# Altium PCB ProPrj_HTXStudio_OneHanded_Keyboard.PcbDoc (part 11 of 11)
Units mm, origin at the board's own origin, x right, y up, seen from the top; angles counter-clockwise.
Board outline 152.4 x 101.6 mm, 20 copper layers (F.Cu, F.Mask, B.Cu, B.Mask, In1.Cu, F.SilkS, In2.Cu, B.SilkS, F.Adhes, B.Adhes, F.Paste, B.Paste, Dwgs.User, Cmts.User, Eco1.User, Eco2.User, Edge.Cuts, Margin, B.CrtYd, F.CrtYd); 269 components, 0 nets, 747 pads, 1168 vias.
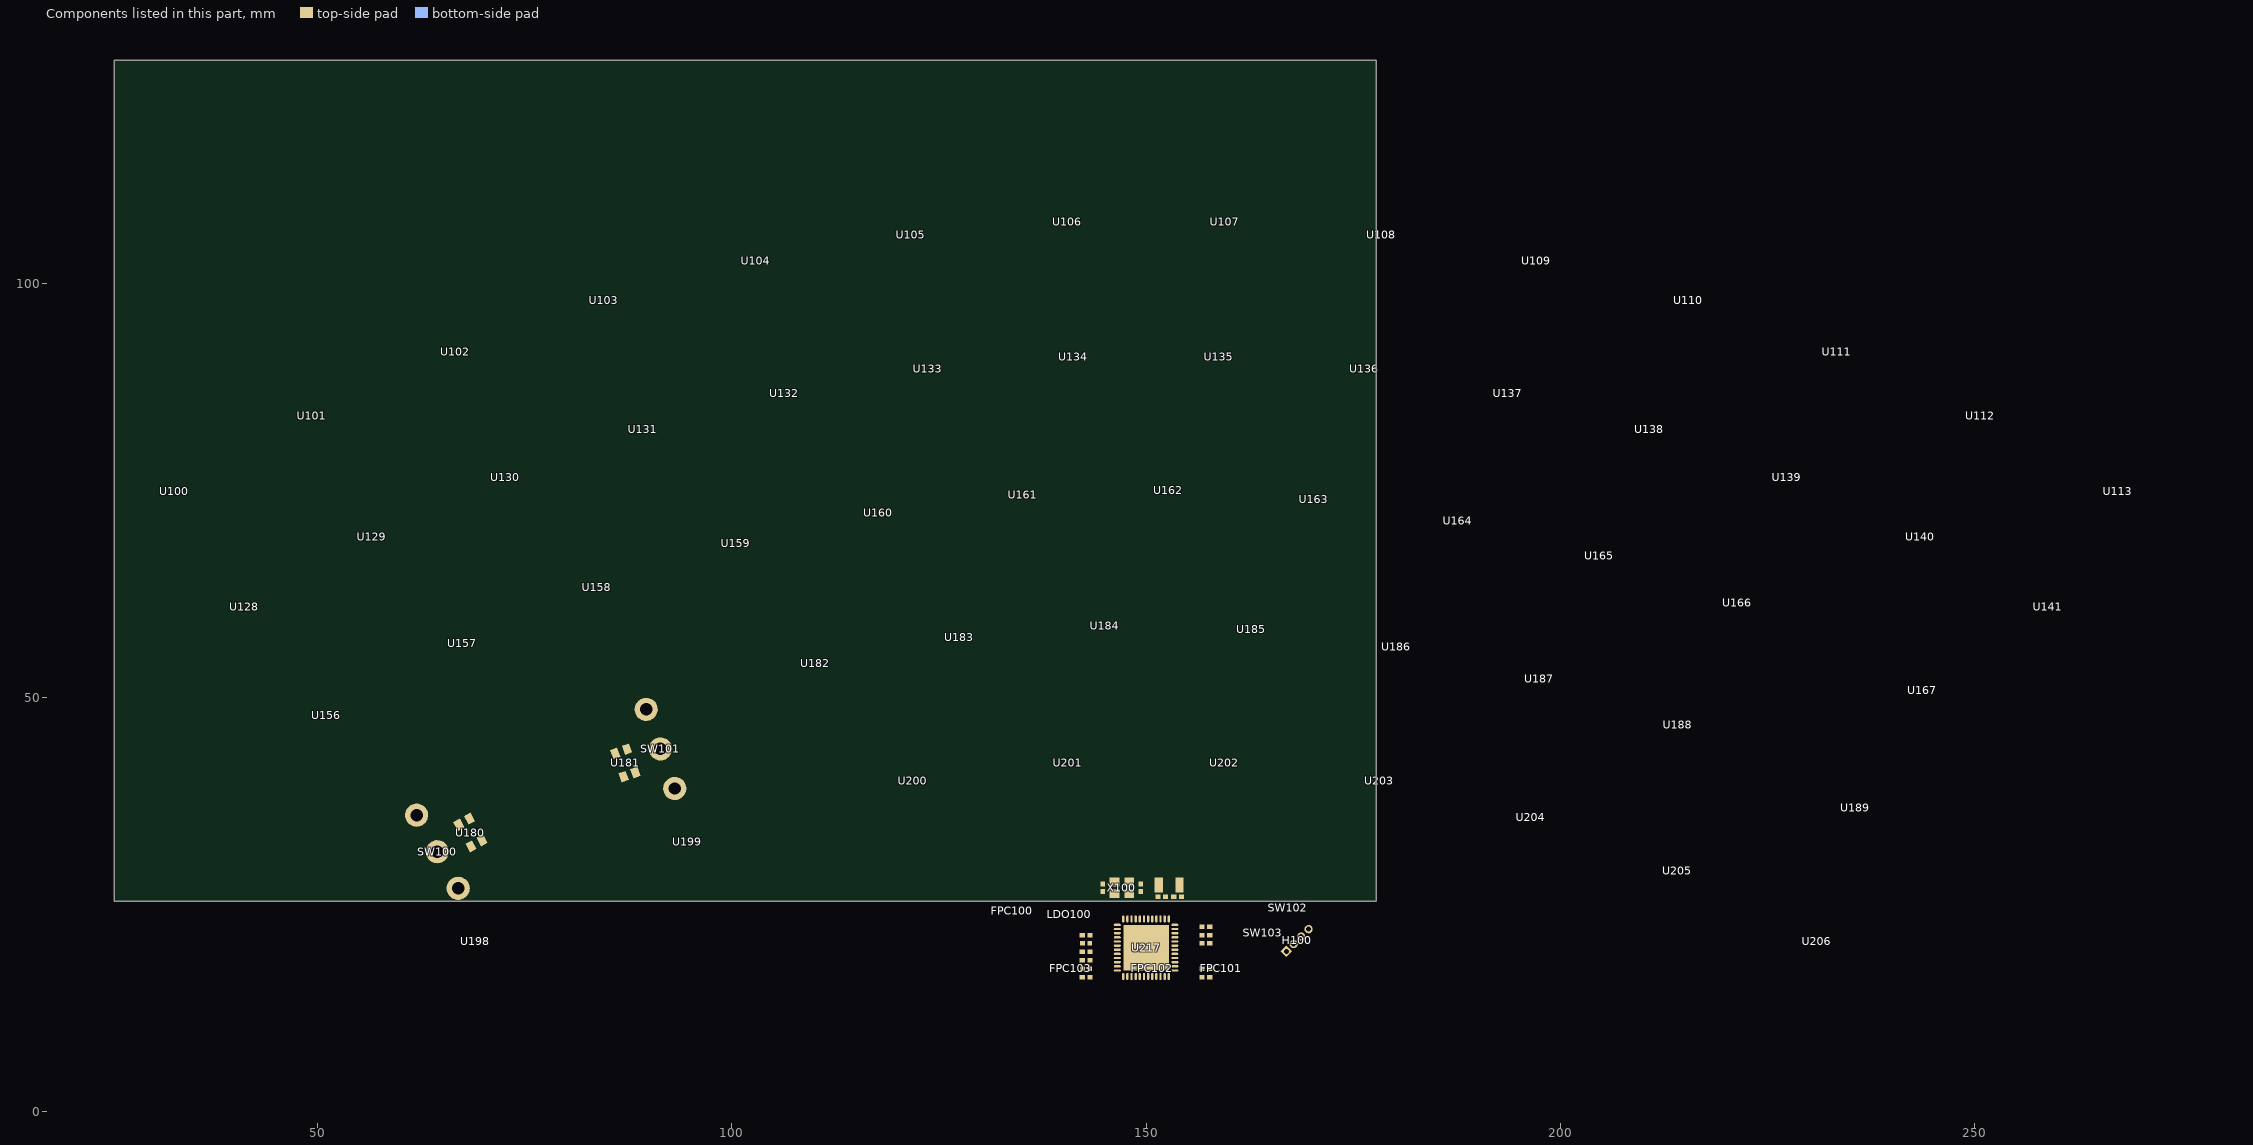
[diagram p23: the components of this part, seen from the top]

## Polygon pours and split planes (outlines as drawn) (continued)
no net on B.Cu "B.Cu--100" (solid, remove dead copper, pour order 762): 139.816,20.08 139.672,19.937 139.633,19.965 139.587,19.984 139.538,19.995 139.488,20 139.753,20.265 139.758,20.215 139.769,20.166 139.787,20.12
no net on B.Cu "B.Cu--94" (solid, remove dead copper, pour order 761): 147.512,94.063 147.275,93.87 147.237,93.93 147.199,93.984 147.179,94.005 147.155,94.023 147.126,94.036 147.092,94.043 147.37,94.295 147.374,94.254 147.383,94.221 147.397,94.194 147.415,94.171 147.46,94.124 147.485,94.097
no net on B.Cu "B.Cu--93" (solid, remove dead copper, pour order 760): 220.731,81.261 221.035,81.245 221.032,81.197 221.032,81.152 221.039,81.109 221.048,81.089 221.062,81.069 220.687,81.088 220.702,81.106 220.714,81.126 220.725,81.167 220.729,81.212
no net on B.Cu "B.Cu--86" (solid, remove dead copper, pour order 759): 159.849,20.406 159.706,20.55 159.734,20.589 159.753,20.635 159.764,20.685 159.769,20.735 160.034,20.469 159.985,20.464 159.935,20.453 159.888,20.435
no net on B.Cu "B.Cu--85" (solid, remove dead copper, pour order 758): 95.26,55.861 94.97,55.767 94.955,55.813 94.94,55.855 94.917,55.892 94.902,55.908 94.883,55.922 95.238,56.039 95.231,56.016 95.228,55.994 95.232,55.951 95.244,55.907
no net on B.Cu "B.Cu--84" (solid, remove dead copper, pour order 757): 150.142,80.483 149.836,80.492 149.839,80.542 149.839,80.586 149.831,80.629 149.821,80.649 149.807,80.669 150.182,80.656 150.167,80.637 150.156,80.618 150.145,80.576 150.142,80.532
no net on B.Cu "B.Cu--81" (solid, remove dead copper, pour order 756): 48.442,67.596 48.672,67.797 48.703,67.76 48.734,67.727 48.77,67.702 48.79,67.693 48.813,67.688 48.531,67.442 48.529,67.466 48.523,67.487 48.503,67.525 48.475,67.56
no net on B.Cu "B.Cu--77" (solid, remove dead copper, pour order 755): 193.532,58.925 193.23,58.965 193.237,59.014 193.242,59.059 193.238,59.101 193.23,59.123 193.219,59.144 193.59,59.093 193.573,59.076 193.561,59.058 193.546,59.017 193.538,58.973
no net on B.Cu "B.Cu--75" (solid, remove dead copper, pour order 754): 68.993,63.376 68.712,63.257 68.693,63.303 68.675,63.344 68.649,63.378 68.632,63.393 68.612,63.405 68.957,63.551 68.952,63.527 68.95,63.505 68.957,63.463 68.973,63.421
no net on B.Cu "B.Cu--72" (solid, remove dead copper, pour order 753): 156.211,22.016 156.211,21.66 156.157,21.666 156.115,21.676 156.096,21.677 156.077,21.675 156.057,21.666 156.035,21.65 156.035,22.025 156.057,22.009 156.077,22.001 156.096,21.998 156.115,22 156.157,22.01
no net on B.Cu "B.Cu--69" (solid, remove dead copper, pour order 752): 166.766,79.789 166.462,79.813 166.467,79.862 166.469,79.907 166.462,79.95 166.454,79.97 166.442,79.991 166.815,79.96 166.799,79.942 166.787,79.923 166.775,79.882 166.769,79.837
no net on B.Cu "B.Cu--68" (solid, remove dead copper, pour order 751): 222.817,30.992 222.526,31.081 222.541,31.128 222.552,31.171 222.556,31.214 222.552,31.236 222.543,31.259 222.902,31.15 222.883,31.135 222.867,31.119 222.846,31.082 222.831,31.039
no net on B.Cu "B.Cu--64" (solid, remove dead copper, pour order 750): 154.767,20.755 154.638,20.914 154.667,20.953 154.686,20.997 154.698,21.046 154.705,21.095 154.955,20.815 154.904,20.812 154.854,20.802 154.806,20.784 154.785,20.771
no net on B.Cu "B.Cu--62" (solid, remove dead copper, pour order 749): 144.214,63.814 143.91,63.785 143.907,63.834 143.902,63.879 143.887,63.919 143.876,63.938 143.859,63.956 144.233,63.991 144.22,63.97 144.213,63.95 144.207,63.907 144.209,63.862
no net on B.Cu "B.Cu--58" (solid, remove dead copper, pour order 748): 202.835,39.762 202.556,39.884 202.577,39.929 202.593,39.971 202.6,40.013 202.6,40.035 202.594,40.059 202.938,39.909 202.917,39.897 202.9,39.882 202.874,39.848 202.854,39.807
no net on B.Cu "B.Cu--55" (solid, remove dead copper, pour order 747): 150.694,93.412 150.996,93.451 151.001,93.403 151.009,93.359 151.025,93.319 151.037,93.3 151.054,93.282 150.681,93.234 150.694,93.255 150.701,93.276 150.705,93.319 150.701,93.364
no net on B.Cu "B.Cu--54" (solid, remove dead copper, pour order 746): 100.341,74.404 100.051,74.309 100.037,74.355 100.021,74.397 99.998,74.434 99.983,74.45 99.963,74.463 100.319,74.581 100.312,74.558 100.308,74.536 100.312,74.493 100.325,74.45
no net on B.Cu "B.Cu--53" (solid, remove dead copper, pour order 745): 82.8,47.329 82.739,47.03 82.692,47.04 82.647,47.048 82.604,47.046 82.582,47.041 82.561,47.03 82.635,47.398 82.652,47.38 82.669,47.366 82.708,47.348 82.752,47.337
no net on B.Cu "B.Cu--52" (solid, remove dead copper, pour order 744): 155.363,21.66 155.57,21.982 155.597,21.968 155.618,21.953 155.636,21.946 155.644,21.95 155.652,21.96 155.756,21.615 155.705,21.638 155.657,21.652 155.611,21.66 155.567,21.664 155.472,21.662
no net on B.Cu "B.Cu--50" (solid, remove dead copper, pour order 743): 150.327,31.185 150.025,31.14 150.019,31.189 150.011,31.233 149.995,31.273 149.982,31.291 149.965,31.308 150.336,31.363 150.325,31.342 150.318,31.32 150.314,31.278 150.32,31.233
no net on B.Cu "B.Cu--47" (solid, remove dead copper, pour order 742): 156.014,21.537 155.692,21.331 155.694,21.44 155.696,21.534 155.693,21.58 155.684,21.625 155.67,21.673 155.647,21.724 155.992,21.62 155.982,21.612 155.978,21.604 155.985,21.586 156.001,21.564
no net on B.Cu "B.Cu--39" (solid, remove dead copper, pour order 741): 133.001,92.749 133.296,92.827 133.308,92.78 133.322,92.737 133.342,92.699 133.356,92.682 133.375,92.667 133.013,92.571 133.021,92.594 133.026,92.615 133.025,92.659 133.015,92.703
no net on B.Cu "B.Cu--37" (solid, remove dead copper, pour order 601): 139.191,23.129 139.191,21.165 139.758,20.599 141.7,20.599 141.7,21.387 140.639,22.448 140.639,22.736 140.246,23.129
no net on B.Cu "B.Cu--36" (solid, remove dead copper, pour order 740): 116.889,77.744 116.587,77.703 116.581,77.751 116.574,77.795 116.558,77.836 116.545,77.855 116.528,77.871 116.9,77.922 116.888,77.901 116.881,77.88 116.877,77.837 116.882,77.792
no net on B.Cu "B.Cu--32" (solid, remove dead copper, pour order 739): 21 vertices, not listed, extent 155.754,21.453 156.328,22.014
no net on B.Cu "B.Cu--31" (solid, remove dead copper, pour order 738): 201.033,36.894 200.729,36.849 200.721,36.893 200.717,36.931 200.714,36.995 200.709,37.024 200.699,37.052 200.682,37.082 200.653,37.114 201.027,37.142 201.009,37.113 200.999,37.084 200.996,37.054 200.998,37.024 201.013,36.962
no net on B.Cu "B.Cu--29" (solid, remove dead copper, pour order 737): 199.407,74.291 199.103,74.319 199.108,74.367 199.111,74.412 199.104,74.454 199.096,74.476 199.084,74.496 199.457,74.463 199.441,74.445 199.429,74.426 199.416,74.385 199.411,74.34
no net on B.Cu "B.Cu--23" (solid, remove dead copper, pour order 736): 183.049,77.687 182.744,77.684 182.744,77.733 182.742,77.778 182.732,77.82 182.721,77.84 182.707,77.859 183.082,77.862 183.068,77.843 183.058,77.823 183.049,77.781 183.048,77.736
no net on B.Cu "B.Cu--19" (solid, remove dead copper, pour order 735): 186.333,43.789 186.029,43.819 186.035,43.867 186.037,43.912 186.032,43.954 186.024,43.976 186.011,43.996 186.384,43.959 186.368,43.941 186.357,43.922 186.343,43.881 186.337,43.837
no net on B.Cu "B.Cu--17" (solid, remove dead copper, pour order 734): 50.148,31.457 50.453,31.461 50.453,31.412 50.455,31.367 50.465,31.325 50.475,31.305 50.491,31.286 50.116,31.281 50.13,31.301 50.139,31.321 50.149,31.363 50.15,31.408
no net on B.Cu "B.Cu--16" (solid, remove dead copper, pour order 733): 247.685,50.019 247.698,50.273 247.742,50.276 247.791,50.286 247.838,50.302 247.876,50.325 247.857,49.95 247.822,49.976 247.776,49.998 247.729,50.013
no net on B.Cu "B.Cu--13" (solid, remove dead copper, pour order 732): 111.364,59.904 111.067,59.835 111.056,59.883 111.044,59.926 111.026,59.965 111.011,59.982 110.993,59.998 111.358,60.083 111.348,60.061 111.344,60.039 111.343,59.996 111.352,59.952
no net on B.Cu "B.Cu--11" (solid, remove dead copper, pour order 731): 246.035,55.765 245.763,55.901 245.785,55.944 245.803,55.985 245.814,56.027 245.814,56.049 245.809,56.073 246.145,55.906 246.124,55.895 246.105,55.881 246.078,55.848 246.057,55.809
no net on B.Cu "B.Cu--9" (solid, remove dead copper, pour order 730): 215.57,69.229 215.28,69.324 215.297,69.37 215.31,69.413 215.313,69.456 215.31,69.478 215.302,69.501 215.658,69.383 215.638,69.37 215.623,69.354 215.601,69.317 215.584,69.275
no net on B.Cu "B.Cu--8" (solid, remove dead copper, pour order 729): 217.585,15.112 217.279,15.116 217.281,15.164 217.28,15.209 217.271,15.251 217.261,15.271 217.246,15.291 217.622,15.287 217.607,15.267 217.597,15.248 217.586,15.206 217.585,15.161
no net on B.Cu "B.Cu--6" (solid, remove dead copper, pour order 728): 253.403,66.462 253.707,66.447 253.704,66.398 253.703,66.353 253.711,66.311 253.72,66.29 253.734,66.27 253.359,66.289 253.374,66.308 253.385,66.327 253.397,66.368 253.401,66.413
no net on B.Cu "B.Cu--4" (solid, remove dead copper, pour order 727): 143.853,20.918 144.209,20.918 144.203,20.864 144.193,20.822 144.191,20.803 144.194,20.784 144.203,20.764 144.218,20.743 143.843,20.743 143.859,20.764 143.868,20.784 143.87,20.803 143.869,20.822 143.859,20.864
no net on B.Cu "B.Cu--3" (solid, remove dead copper, pour order 726): 48.357,51.454 48.175,51.63 48.224,51.683 48.266,51.736 48.284,51.764 48.298,51.794 48.308,51.826 48.312,51.86 48.58,51.597 48.546,51.592 48.515,51.582 48.485,51.567 48.458,51.549 48.406,51.504
no net on In2.Cu "In2.Cu--118" (solid, remove dead copper, pour order 725): 133.782,23.989 134.087,23.989 134.086,23.94 134.087,23.895 134.097,23.853 134.107,23.833 134.122,23.814 133.747,23.814 133.762,23.833 133.772,23.853 133.782,23.895 133.783,23.94
no net on In2.Cu "In2.Cu--117" (solid, remove dead copper, pour order 724): 186.855,89.452 186.551,89.452 186.551,89.501 186.55,89.546 186.54,89.588 186.53,89.608 186.515,89.627 186.89,89.627 186.876,89.608 186.866,89.588 186.856,89.546 186.855,89.501
no net on In2.Cu "In2.Cu--116" (solid, remove dead copper, pour order 723): 120.257,45.937 120.561,45.937 120.561,45.888 120.562,45.843 120.572,45.801 120.582,45.781 120.596,45.762 120.221,45.762 120.236,45.781 120.246,45.801 120.256,45.843 120.257,45.888
no net on In2.Cu "In2.Cu--115" (solid, remove dead copper, pour order 722): 67.255,7.05 67.503,7.227 67.532,7.187 67.559,7.151 67.591,7.123 67.611,7.112 67.634,7.105 67.328,6.887 67.329,6.912 67.325,6.933 67.309,6.973 67.285,7.011
no net on In2.Cu "In2.Cu--114" (solid, remove dead copper, pour order 721): 159.442,17.169 159.442,17.423 159.487,17.427 159.534,17.439 159.581,17.458 159.617,17.483 159.617,17.108 159.581,17.132 159.534,17.151 159.487,17.164
no net on In2.Cu "In2.Cu--113" (solid, remove dead copper, pour order 720): 81.892,81.616 81.593,81.554 81.585,81.602 81.574,81.646 81.556,81.685 81.542,81.702 81.524,81.718 81.891,81.794 81.881,81.772 81.875,81.751 81.874,81.708 81.881,81.663
no net on In2.Cu "In2.Cu--112" (solid, remove dead copper, pour order 719): 84.401,69.191 84.098,69.161 84.092,69.203 84.092,69.241 84.09,69.305 84.087,69.335 84.078,69.364 84.061,69.393 84.035,69.425 84.41,69.443 84.39,69.414 84.379,69.385 84.374,69.356 84.376,69.325 84.386,69.261
no net on In2.Cu "In2.Cu--111" (solid, remove dead copper, pour order 718): 41.477,44.51 41.224,44.34 41.198,44.381 41.172,44.417 41.14,44.446 41.12,44.457 41.098,44.465 41.409,44.675 41.408,44.651 41.41,44.629 41.426,44.588 41.45,44.55
no net on In2.Cu "In2.Cu--110" (solid, remove dead copper, pour order 717): 133.388,92.034 133.084,92.034 133.088,92.11 133.093,92.174 133.091,92.205 133.084,92.234 133.071,92.264 133.048,92.294 133.423,92.294 133.401,92.264 133.388,92.234 133.381,92.204 133.378,92.174 133.384,92.11
no net on In2.Cu "In2.Cu--109" (solid, remove dead copper, pour order 716): 253.691,65.774 253.386,65.774 253.386,65.823 253.384,65.868 253.374,65.91 253.364,65.93 253.35,65.949 253.725,65.949 253.711,65.93 253.701,65.91 253.691,65.868 253.69,65.823
no net on In2.Cu "In2.Cu--108" (solid, remove dead copper, pour order 715): 133.261,79.546 132.957,79.546 132.957,79.595 132.956,79.64 132.946,79.682 132.936,79.702 132.921,79.721 133.296,79.721 133.282,79.702 133.272,79.682 133.262,79.64 133.261,79.595
no net on In2.Cu "In2.Cu--107" (solid, remove dead copper, pour order 714): 215.684,69.259 215.38,69.259 215.38,69.308 215.379,69.353 215.369,69.395 215.359,69.415 215.344,69.434 215.719,69.434 215.705,69.415 215.695,69.395 215.685,69.353 215.684,69.308
no net on In2.Cu "In2.Cu--106" (solid, remove dead copper, pour order 713): 186.043,44.467 186.347,44.496 186.347,44.447 186.35,44.401 186.361,44.359 186.373,44.34 186.388,44.321 186.014,44.292 186.027,44.313 186.037,44.333 186.044,44.375
no net on In2.Cu "In2.Cu--105" (solid, remove dead copper, pour order 712): 222.923,31.022 222.619,31.022 222.619,31.071 222.618,31.116 222.608,31.158 222.598,31.178 222.583,31.197 222.958,31.197 222.944,31.178 222.934,31.158 222.924,31.116 222.923,31.071
no net on In2.Cu "In2.Cu--104" (solid, remove dead copper, pour order 711): 50.627,30.929 50.378,30.753 50.35,30.793 50.323,30.829 50.291,30.857 50.271,30.867 50.248,30.875 50.554,31.092 50.553,31.068 50.557,31.046 50.573,31.006 50.598,30.969
no net on In2.Cu "In2.Cu--103" (solid, remove dead copper, pour order 710): 245.71,55.985 245.71,56.29 245.759,56.289 245.804,56.29 245.847,56.3 245.866,56.31 245.886,56.325 245.886,55.95 245.866,55.964 245.847,55.974 245.804,55.984 245.759,55.986
no net on In2.Cu "In2.Cu--102" (solid, remove dead copper, pour order 709): 134.461,23.989 134.765,23.989 134.765,23.94 134.766,23.895 134.776,23.853 134.786,23.833 134.801,23.814 134.425,23.814 134.439,23.833 134.449,23.853 134.459,23.895 134.461,23.94
no net on In2.Cu "In2.Cu--101" (solid, remove dead copper, pour order 708): 202.984,39.795 202.68,39.795 202.68,39.844 202.679,39.889 202.669,39.931 202.659,39.951 202.644,39.97 203.019,39.97 203.005,39.951 202.995,39.931 202.985,39.889 202.984,39.844
no net on In2.Cu "In2.Cu--100" (solid, remove dead copper, pour order 707): 232.321,46.78 232.017,46.78 232.017,46.829 232.016,46.874 232.006,46.916 231.996,46.936 231.981,46.955 232.356,46.955 232.342,46.936 232.332,46.916 232.322,46.874 232.321,46.829
no net on In2.Cu "In2.Cu--99" (solid, remove dead copper, pour order 706): 160.683,63.677 160.378,63.677 160.379,63.725 160.377,63.77 160.367,63.812 160.357,63.832 160.343,63.852 160.718,63.852 160.703,63.832 160.693,63.812 160.683,63.77 160.682,63.725
no net on In2.Cu "In2.Cu--98" (solid, remove dead copper, pour order 705): 159.868,20.388 159.688,20.568 159.716,20.602 159.741,20.645 159.76,20.691 159.769,20.735 160.034,20.469 159.991,20.461 159.945,20.442 159.902,20.416
no net on In2.Cu "In2.Cu--97" (solid, remove dead copper, pour order 704): 140.748,20.717 141.053,20.717 141.052,20.668 141.055,20.623 141.065,20.581 141.075,20.561 141.089,20.542 140.714,20.542 140.728,20.561 140.738,20.581 140.748,20.623 140.75,20.668
no net on In2.Cu "In2.Cu--96" (solid, remove dead copper, pour order 703): 133.104,23.989 133.408,23.989 133.408,23.94 133.409,23.895 133.419,23.853 133.429,23.833 133.443,23.814 133.068,23.814 133.083,23.833 133.093,23.853 133.103,23.895 133.104,23.94
no net on In2.Cu "In2.Cu--95" (solid, remove dead copper, pour order 702): 56.715,53.39 56.775,53.692 56.84,53.668 56.901,53.65 56.93,53.646 56.959,53.648 56.988,53.657 57.017,53.673 56.98,53.3 56.947,53.331 56.918,53.351 56.89,53.361 56.861,53.367 56.798,53.372 56.76,53.378
no net on In2.Cu "In2.Cu--94" (solid, remove dead copper, pour order 701): 98.995,86.458 98.693,86.426 98.688,86.475 98.682,86.52 98.667,86.56 98.655,86.579 98.64,86.597 99.012,86.636 99,86.615 98.992,86.595 98.987,86.552 98.99,86.507
no net on In2.Cu "In2.Cu--93" (solid, remove dead copper, pour order 700): 201.283,22.12 201.263,22.425 201.34,22.427 201.405,22.426 201.435,22.43 201.464,22.438 201.494,22.454 201.524,22.479 201.539,22.104 201.509,22.124 201.48,22.136 201.45,22.142 201.42,22.142 201.356,22.132
no net on In2.Cu "In2.Cu--92" (solid, remove dead copper, pour order 699): 115.12,27.022 114.813,27.001 114.808,27.046 114.807,27.085 114.81,27.148 114.807,27.177 114.8,27.206 114.784,27.238 114.758,27.273 115.133,27.267 115.113,27.24 115.101,27.212 115.096,27.183 115.095,27.153 115.104,27.09
no net on In2.Cu "In2.Cu--91" (solid, remove dead copper, pour order 698): 246.391,56.29 246.391,55.985 246.342,55.986 246.298,55.984 246.255,55.974 246.235,55.964 246.216,55.95 246.216,56.325 246.235,56.31 246.255,56.3 246.298,56.29 246.342,56.289
no net on In2.Cu "In2.Cu--90" (solid, remove dead copper, pour order 697): 151.017,92.744 150.713,92.766 150.717,92.814 150.718,92.859 150.711,92.902 150.703,92.923 150.69,92.943 151.064,92.916 151.048,92.898 151.037,92.878 151.024,92.837 151.019,92.792
no net on In2.Cu "In2.Cu--89" (solid, remove dead copper, pour order 696): 177.33,62.02 177.026,62.02 177.026,62.069 177.025,62.114 177.015,62.156 177.005,62.176 176.99,62.195 177.365,62.195 177.351,62.176 177.341,62.156 177.331,62.114 177.33,62.069
no net on In2.Cu "In2.Cu--88" (solid, remove dead copper, pour order 695): 100.241,74.339 99.937,74.339 99.937,74.388 99.936,74.433 99.926,74.475 99.916,74.495 99.901,74.514 100.276,74.514 100.262,74.495 100.252,74.475 100.242,74.433 100.241,74.388
no net on In2.Cu "In2.Cu--87" (solid, remove dead copper, pour order 694): 116.845,77.72 116.54,77.72 116.541,77.769 116.538,77.814 116.529,77.856 116.519,77.876 116.504,77.895 116.879,77.895 116.865,77.876 116.855,77.856 116.845,77.814 116.844,77.769
no net on In2.Cu "In2.Cu--86" (solid, remove dead copper, pour order 693): 199.438,74.303 199.132,74.303 199.133,74.352 199.131,74.397 199.121,74.439 199.111,74.459 199.098,74.478 199.472,74.478 199.458,74.459 199.448,74.439 199.438,74.397 199.436,74.352
no net on In2.Cu "In2.Cu--85" (solid, remove dead copper, pour order 692): 158.544,26.252 158.849,26.252 158.848,26.203 158.849,26.158 158.859,26.116 158.869,26.096 158.884,26.077 158.509,26.077 158.524,26.096 158.534,26.116 158.543,26.158 158.545,26.203
no net on In2.Cu "In2.Cu--84" (solid, remove dead copper, pour order 691): 204.033,85.951 203.728,85.951 203.729,85.999 203.727,86.044 203.717,86.086 203.707,86.106 203.693,86.126 204.068,86.126 204.054,86.106 204.044,86.086 204.034,86.044 204.033,85.999
no net on In2.Cu "In2.Cu--83" (solid, remove dead copper, pour order 690): 162.003,26.342 162.311,26.328 162.296,26.261 162.288,26.199 162.289,26.169 162.295,26.141 162.308,26.114 162.328,26.088 161.954,26.065 161.969,26.09 161.979,26.122 161.99,26.198 161.997,26.277
no net on In2.Cu "In2.Cu--82" (solid, remove dead copper, pour order 689): 201.99,22.508 202.076,22.203 202.025,22.203 201.977,22.199 201.955,22.194 201.935,22.185 201.917,22.172 201.901,22.153 201.815,22.518 201.86,22.501 201.899,22.499 201.939,22.504
no net on In2.Cu "In2.Cu--81" (solid, remove dead copper, pour order 688): 161.284,26.348 161.589,26.322 161.573,26.253 161.563,26.19 161.563,26.16 161.568,26.131 161.58,26.102 161.599,26.074 161.225,26.079 161.251,26.113 161.267,26.143 161.275,26.172 161.278,26.202 161.277,26.266 161.278,26.304
no net on In2.Cu "In2.Cu--80" (solid, remove dead copper, pour order 687): 136.944,47.288 136.64,47.288 136.64,47.337 136.639,47.382 136.629,47.424 136.619,47.444 136.604,47.463 136.979,47.463 136.965,47.444 136.955,47.424 136.945,47.382 136.944,47.337
no net on In2.Cu "In2.Cu--79" (solid, remove dead copper, pour order 686): 110.986,60.542 111.29,60.542 111.29,60.493 111.291,60.448 111.301,60.406 111.311,60.386 111.325,60.367 110.95,60.367 110.965,60.386 110.975,60.406 110.985,60.448 110.986,60.493
no net on In2.Cu "In2.Cu--78" (solid, remove dead copper, pour order 685): 217.285,15.795 217.589,15.794 217.589,15.745 217.59,15.7 217.6,15.658 217.61,15.638 217.624,15.619 217.249,15.62 217.263,15.639 217.273,15.659 217.283,15.701 217.285,15.746
no net on In2.Cu "In2.Cu--77" (solid, remove dead copper, pour order 684): 215.38,69.94 215.684,69.94 215.684,69.891 215.685,69.846 215.695,69.804 215.705,69.784 215.719,69.765 215.344,69.765 215.359,69.784 215.369,69.804 215.379,69.846 215.38,69.891
no net on In2.Cu "In2.Cu--76" (solid, remove dead copper, pour order 683): 231.305,63.29 231.001,63.29 231.001,63.339 231,63.384 230.99,63.426 230.98,63.446 230.965,63.465 231.34,63.465 231.326,63.446 231.316,63.426 231.306,63.384 231.305,63.339
no net on In2.Cu "In2.Cu--75" (solid, remove dead copper, pour order 682): 116.516,78.389 116.82,78.411 116.822,78.362 116.828,78.317 116.841,78.276 116.852,78.257 116.868,78.239 116.494,78.212 116.506,78.232 116.515,78.253 116.522,78.296 116.52,78.341
no net on In2.Cu "In2.Cu--74" (solid, remove dead copper, pour order 681): 40.848,44.91 41.104,45.076 41.13,45.034 41.156,44.997 41.186,44.968 41.206,44.956 41.229,44.948 40.913,44.744 40.916,44.768 40.913,44.79 40.899,44.831 40.875,44.869
no net on In2.Cu "In2.Cu--73" (solid, remove dead copper, pour order 680): 221.018,80.573 220.714,80.573 220.714,80.621 220.713,80.667 220.703,80.709 220.693,80.728 220.678,80.748 221.053,80.748 221.039,80.728 221.029,80.709 221.019,80.667 221.018,80.621
no net on In2.Cu "In2.Cu--72" (solid, remove dead copper, pour order 679): 177.026,62.701 177.33,62.701 177.33,62.652 177.331,62.607 177.341,62.565 177.351,62.545 177.365,62.526 176.99,62.526 177.005,62.545 177.015,62.565 177.025,62.607 177.026,62.652
no net on In2.Cu "In2.Cu--71" (solid, remove dead copper, pour order 678): 66.647,40.161 66.647,39.856 66.599,39.857 66.553,39.855 66.512,39.845 66.492,39.835 66.473,39.821 66.473,40.196 66.492,40.181 66.512,40.171 66.553,40.161 66.599,40.16
no net on In2.Cu "In2.Cu--70" (solid, remove dead copper, pour order 677): 169.914,47.08 170.218,47.08 170.218,47.031 170.219,46.986 170.229,46.944 170.239,46.924 170.253,46.905 169.878,46.905 169.893,46.924 169.903,46.944 169.913,46.986 169.914,47.031
no net on In2.Cu "In2.Cu--69" (solid, remove dead copper, pour order 676): 141.447,20.59 141.753,20.59 141.751,20.541 141.753,20.496 141.763,20.454 141.773,20.434 141.787,20.415 141.413,20.415 141.427,20.434 141.437,20.454 141.447,20.496 141.449,20.541
no net on In2.Cu "In2.Cu--68" (solid, remove dead copper, pour order 675): 65.967,39.856 65.967,40.161 66.015,40.16 66.061,40.161 66.102,40.171 66.122,40.181 66.142,40.196 66.142,39.821 66.122,39.835 66.102,39.845 66.061,39.855 66.015,39.857
no net on In2.Cu "In2.Cu--67" (solid, remove dead copper, pour order 674): 68.568,63.971 68.872,63.971 68.872,63.922 68.873,63.877 68.883,63.835 68.893,63.815 68.907,63.796 68.532,63.796 68.547,63.815 68.557,63.835 68.567,63.877 68.568,63.922
no net on In2.Cu "In2.Cu--66" (solid, remove dead copper, pour order 673): 82.776,47.4 82.776,47.095 82.728,47.096 82.682,47.094 82.641,47.084 82.621,47.074 82.602,47.06 82.602,47.435 82.621,47.42 82.641,47.41 82.682,47.4 82.728,47.399
no net on In2.Cu "In2.Cu--65" (solid, remove dead copper, pour order 672): 83.996,69.902 84.294,69.963 84.303,69.915 84.314,69.872 84.333,69.833 84.346,69.815 84.364,69.799 83.997,69.723 84.007,69.745 84.013,69.767 84.014,69.81 84.006,69.854
no net on In2.Cu "In2.Cu--64" (solid, remove dead copper, pour order 671): 99.901,75.002 100.205,75.034 100.209,74.985 100.215,74.941 100.229,74.9 100.242,74.881 100.258,74.863 99.885,74.824 99.897,74.845 99.905,74.866 99.911,74.908 99.907,74.954
no net on In2.Cu "In2.Cu--63" (solid, remove dead copper, pour order 670): 134.74,23.308 134.486,23.308 134.481,23.352 134.469,23.4 134.449,23.446 134.425,23.483 134.801,23.483 134.776,23.446 134.757,23.4 134.745,23.352
no net on In2.Cu "In2.Cu--62" (solid, remove dead copper, pour order 669): 94.57,56.025 94.603,56.329 94.673,56.313 94.736,56.301 94.766,56.3 94.796,56.304 94.825,56.315 94.854,56.334 94.834,55.959 94.802,55.986 94.773,56.003 94.744,56.012 94.714,56.016 94.65,56.017 94.612,56.019
no net on In2.Cu "In2.Cu--61" (solid, remove dead copper, pour order 668): 193.579,58.942 193.274,58.942 193.275,58.991 193.273,59.036 193.263,59.078 193.253,59.098 193.239,59.117 193.614,59.117 193.6,59.098 193.59,59.078 193.58,59.036 193.578,58.991
no net on In2.Cu "In2.Cu--60" (solid, remove dead copper, pour order 667): 237.683,73.502 237.378,73.502 237.379,73.55 237.378,73.596 237.368,73.637 237.358,73.657 237.343,73.677 237.718,73.677 237.704,73.657 237.694,73.637 237.684,73.596 237.682,73.55
no net on In2.Cu "In2.Cu--59" (solid, remove dead copper, pour order 666): 232.017,47.461 232.321,47.461 232.321,47.412 232.322,47.367 232.332,47.325 232.342,47.305 232.356,47.286 231.981,47.286 231.996,47.305 232.006,47.325 232.016,47.367 232.017,47.412
no net on In2.Cu "In2.Cu--58" (solid, remove dead copper, pour order 665): 193.282,59.628 193.586,59.617 193.586,59.568 193.586,59.524 193.596,59.482 193.605,59.462 193.619,59.442 193.244,59.453 193.259,59.472 193.269,59.492 193.28,59.534 193.282,59.579
no net on In2.Cu "In2.Cu--57" (solid, remove dead copper, pour order 664): 67.995,6.694 67.794,6.464 67.737,6.517 67.692,6.564 67.669,6.583 67.642,6.598 67.609,6.608 67.57,6.611 67.826,6.886 67.833,6.85 67.845,6.821 67.863,6.797 67.883,6.775 67.936,6.737
no net on In2.Cu "In2.Cu--56" (solid, remove dead copper, pour order 663): 153.023,48.464 153.327,48.464 153.327,48.415 153.328,48.37 153.338,48.328 153.348,48.308 153.362,48.289 152.987,48.289 153.002,48.308 153.012,48.328 153.022,48.37 153.023,48.415
no net on In2.Cu "In2.Cu--55" (solid, remove dead copper, pour order 662): 184.633,27.046 184.51,27.326 184.581,27.351 184.642,27.372 184.669,27.386 184.693,27.404 184.714,27.429 184.733,27.461 184.887,27.119 184.85,27.127 184.817,27.128 184.787,27.122 184.759,27.111 184.702,27.081
no net on In2.Cu "In2.Cu--54" (solid, remove dead copper, pour order 661): 133.522,23.314 133.167,23.311 133.145,23.335 133.131,23.356 133.117,23.395 133.103,23.434 133.09,23.456 133.07,23.481 133.442,23.481 133.426,23.458 133.422,23.436 133.426,23.416 133.438,23.396 133.476,23.357
no net on In2.Cu "In2.Cu--53" (solid, remove dead copper, pour order 660): 144.183,63.798 143.879,63.798 143.879,63.847 143.878,63.892 143.868,63.934 143.858,63.954 143.843,63.973 144.218,63.973 144.204,63.954 144.194,63.934 144.184,63.892 144.183,63.847
no net on In2.Cu "In2.Cu--52" (solid, remove dead copper, pour order 659): 199.124,74.977 199.428,74.991 199.428,74.942 199.43,74.896 199.441,74.854 199.452,74.834 199.466,74.816 199.091,74.802 199.105,74.822 199.115,74.842 199.124,74.884 199.124,74.929
no net on In2.Cu "In2.Cu--51" (solid, remove dead copper, pour order 658): 111.29,59.861 110.986,59.861 110.986,59.91 110.985,59.955 110.975,59.997 110.965,60.017 110.95,60.036 111.325,60.036 111.311,60.017 111.301,59.997 111.291,59.955 111.29,59.91
no net on In2.Cu "In2.Cu--50" (solid, remove dead copper, pour order 657): 103.858,41.685 103.858,41.38 103.81,41.381 103.764,41.379 103.723,41.369 103.703,41.359 103.684,41.345 103.684,41.72 103.703,41.705 103.723,41.695 103.764,41.685 103.81,41.684
no net on In2.Cu "In2.Cu--49" (solid, remove dead copper, pour order 656): 133.084,30.697 133.388,30.697 133.388,30.648 133.389,30.603 133.399,30.561 133.409,30.541 133.423,30.522 133.048,30.522 133.063,30.541 133.073,30.561 133.083,30.603 133.084,30.648
no net on In2.Cu "In2.Cu--48" (solid, remove dead copper, pour order 655): 116.013,89.844 115.709,89.823 115.706,89.872 115.702,89.917 115.689,89.958 115.678,89.977 115.662,89.995 116.036,90.022 116.023,90.001 116.014,89.981 116.007,89.938 116.009,89.893
no net on In2.Cu "In2.Cu--47" (solid, remove dead copper, pour order 654): 166.301,79.988 166.301,80.293 166.35,80.292 166.395,80.293 166.437,80.303 166.457,80.313 166.476,80.328 166.476,79.953 166.457,79.967 166.437,79.977 166.395,79.987 166.35,79.989
no net on In2.Cu "In2.Cu--46" (solid, remove dead copper, pour order 653): 136.64,47.969 136.944,47.969 136.944,47.92 136.945,47.875 136.955,47.833 136.965,47.813 136.979,47.794 136.604,47.794 136.619,47.813 136.629,47.833 136.639,47.875 136.64,47.92
no net on In2.Cu "In2.Cu--45" (solid, remove dead copper, pour order 652): 149.975,31.84 150.279,31.84 150.279,31.791 150.28,31.746 150.29,31.704 150.3,31.684 150.314,31.665 149.939,31.665 149.954,31.684 149.964,31.704 149.974,31.746 149.975,31.791
no net on In2.Cu "In2.Cu--44" (solid, remove dead copper, pour order 651): 170.218,46.399 169.914,46.399 169.914,46.448 169.913,46.493 169.903,46.535 169.893,46.555 169.878,46.574 170.253,46.574 170.239,46.555 170.229,46.535 170.219,46.493 170.218,46.448
no net on In2.Cu "In2.Cu--43" (solid, remove dead copper, pour order 650): 32.584,58.221 32.328,58.055 32.303,58.096 32.276,58.133 32.246,58.163 32.226,58.174 32.203,58.183 32.518,58.386 32.517,58.362 32.519,58.34 32.534,58.3 32.557,58.261
no net on In2.Cu "In2.Cu--42" (solid, remove dead copper, pour order 649): 169.116,91.726 168.811,91.726 168.812,91.775 168.811,91.82 168.801,91.862 168.791,91.882 168.777,91.901 169.152,91.901 169.138,91.882 169.128,91.862 169.118,91.82 169.116,91.775
no net on In2.Cu "In2.Cu--41" (solid, remove dead copper, pour order 648): 159.286,26.252 159.591,26.252 159.59,26.203 159.591,26.158 159.601,26.116 159.611,26.096 159.626,26.077 159.251,26.077 159.265,26.096 159.275,26.116 159.285,26.158 159.286,26.203
no net on In2.Cu "In2.Cu--40" (solid, remove dead copper, pour order 647): 150.366,31.123 150.066,31.047 150.045,31.111 150.023,31.187 149.997,31.26 149.981,31.289 149.962,31.312 150.333,31.358 150.319,31.33 150.311,31.301 150.31,31.272 150.315,31.243 150.336,31.184
no net on In2.Cu "In2.Cu--39" (solid, remove dead copper, pour order 646): 82.096,47.095 82.096,47.4 82.144,47.399 82.19,47.4 82.231,47.41 82.251,47.42 82.271,47.435 82.271,47.06 82.251,47.074 82.231,47.084 82.19,47.094 82.144,47.096
no net on In2.Cu "In2.Cu--38" (solid, remove dead copper, pour order 645): 231.001,63.971 231.305,63.971 231.305,63.922 231.306,63.877 231.316,63.835 231.326,63.815 231.34,63.796 230.965,63.796 230.98,63.815 230.99,63.835 231,63.877 231.001,63.922
no net on In2.Cu "In2.Cu--37" (solid, remove dead copper, pour order 644): 186.367,43.802 186.062,43.802 186.063,43.85 186.061,43.895 186.051,43.937 186.041,43.957 186.027,43.977 186.402,43.977 186.388,43.957 186.378,43.937 186.367,43.895 186.366,43.85
no net on In2.Cu "In2.Cu--36" (solid, remove dead copper, pour order 643): 209.096,54.207 209.096,54.512 209.144,54.511 209.19,54.512 209.231,54.522 209.251,54.532 209.271,54.547 209.271,54.172 209.251,54.186 209.231,54.196 209.19,54.206 209.144,54.208
no net on In2.Cu "In2.Cu--35" (solid, remove dead copper, pour order 642): 185.348,27.581 185.409,27.279 185.364,27.267 185.325,27.261 185.262,27.255 185.235,27.25 185.207,27.239 185.177,27.219 185.144,27.188 185.106,27.561 185.135,27.545 185.164,27.536 185.193,27.535 185.222,27.538 185.284,27.556
no net on In2.Cu "In2.Cu--33" (solid, remove dead copper, pour order 641): 153.327,47.783 153.023,47.783 153.023,47.832 153.022,47.877 153.012,47.919 153.002,47.939 152.987,47.958 153.362,47.958 153.348,47.939 153.338,47.919 153.328,47.877 153.327,47.832
no net on In2.Cu "In2.Cu--32" (solid, remove dead copper, pour order 640): 202.68,40.476 202.984,40.476 202.984,40.427 202.985,40.382 202.995,40.34 203.005,40.32 203.019,40.301 202.644,40.301 202.659,40.32 202.669,40.34 202.679,40.382 202.68,40.427
no net on In2.Cu "In2.Cu--31" (solid, remove dead copper, pour order 639): 127.673,62.528 127.369,62.528 127.369,62.577 127.368,62.622 127.358,62.664 127.348,62.684 127.333,62.703 127.708,62.703 127.694,62.684 127.684,62.664 127.674,62.622 127.673,62.577
no net on In2.Cu "In2.Cu--30" (solid, remove dead copper, pour order 638): 217.362,15.006 217.097,15.16 217.141,15.216 217.177,15.269 217.19,15.296 217.198,15.325 217.2,15.356 217.195,15.391 217.53,15.222 217.492,15.204 217.465,15.183 217.445,15.16 217.429,15.135 217.402,15.077 217.385,15.043
no net on In2.Cu "In2.Cu--29" (solid, remove dead copper, pour order 637): 209.776,54.512 209.776,54.207 209.728,54.208 209.682,54.206 209.641,54.196 209.621,54.186 209.602,54.172 209.602,54.547 209.621,54.532 209.641,54.522 209.682,54.512 209.728,54.511
no net on In2.Cu "In2.Cu--28" (solid, remove dead copper, pour order 636): 167.755,30.646 168.059,30.627 168.059,30.534 168.067,30.493 168.076,30.472 168.09,30.452 167.715,30.471 167.731,30.49 167.742,30.51 167.752,30.552 167.755,30.597
no net on In2.Cu "In2.Cu--27" (solid, remove dead copper, pour order 635): 182.741,78.366 183.045,78.366 183.045,78.318 183.046,78.273 183.056,78.231 183.066,78.211 183.08,78.191 182.705,78.191 182.72,78.211 182.73,78.231 182.74,78.273 182.741,78.318
no net on In2.Cu "In2.Cu--26" (solid, remove dead copper, pour order 634): 149.872,81.178 150.176,81.157 150.172,81.108 150.17,81.062 150.177,81.02 150.186,81 150.199,80.979 149.825,81.006 149.841,81.024 149.852,81.044 149.865,81.085 149.87,81.129
no net on In2.Cu "In2.Cu--25" (solid, remove dead copper, pour order 633): 49.989,31.316 50.241,31.486 50.268,31.445 50.294,31.408 50.326,31.379 50.346,31.368 50.368,31.36 50.057,31.151 50.058,31.175 50.056,31.197 50.04,31.237 50.016,31.276
no net on In2.Cu "In2.Cu--24" (solid, remove dead copper, pour order 632): 65.008,75.134 64.703,75.134 64.704,75.183 64.702,75.228 64.692,75.27 64.682,75.29 64.668,75.309 65.043,75.309 65.029,75.29 65.019,75.27 65.009,75.228 65.008,75.183
no net on In2.Cu "In2.Cu--23" (solid, remove dead copper, pour order 631): 160.556,26.351 160.86,26.317 160.844,26.248 160.831,26.184 160.83,26.154 160.834,26.125 160.845,26.095 160.864,26.066 160.49,26.087 160.516,26.118 160.533,26.148 160.543,26.177 160.547,26.206 160.548,26.271 160.55,26.308
no net on In2.Cu "In2.Cu--22" (solid, remove dead copper, pour order 630): 68.872,63.29 68.568,63.29 68.568,63.339 68.567,63.384 68.557,63.426 68.547,63.446 68.532,63.465 68.907,63.465 68.893,63.446 68.883,63.426 68.873,63.384 68.872,63.339
no net on In2.Cu "In2.Cu--21" (solid, remove dead copper, pour order 629): 222.619,31.703 222.923,31.703 222.923,31.654 222.924,31.609 222.934,31.567 222.944,31.547 222.958,31.528 222.583,31.528 222.598,31.547 222.608,31.567 222.618,31.609 222.619,31.654
no net on In2.Cu "In2.Cu--20" (solid, remove dead copper, pour order 628): 143.879,64.479 144.183,64.479 144.183,64.43 144.184,64.385 144.194,64.343 144.204,64.323 144.218,64.304 143.843,64.304 143.858,64.323 143.868,64.343 143.878,64.385 143.879,64.43
no net on In2.Cu "In2.Cu--19" (solid, remove dead copper, pour order 627): 133.479,29.983 133.179,29.904 133.158,29.967 133.135,30.043 133.108,30.115 133.091,30.145 133.071,30.168 133.443,30.217 133.429,30.188 133.422,30.16 133.422,30.131 133.426,30.103 133.449,30.043
no net on In2.Cu "In2.Cu--18" (solid, remove dead copper, pour order 626): 166.982,80.293 166.982,79.988 166.933,79.989 166.888,79.987 166.846,79.977 166.826,79.967 166.807,79.953 166.807,80.328 166.826,80.313 166.846,80.303 166.888,80.293 166.933,80.292
no net on In2.Cu "In2.Cu--17" (solid, remove dead copper, pour order 625): 160.389,64.365 160.693,64.349 160.693,64.3 160.693,64.256 160.701,64.214 160.711,64.194 160.724,64.174 160.35,64.19 160.365,64.209 160.376,64.229 160.387,64.271 160.389,64.316
no net on In2.Cu "In2.Cu--16" (solid, remove dead copper, pour order 624): 139.351,20.59 139.655,20.59 139.655,20.541 139.656,20.496 139.666,20.454 139.676,20.434 139.691,20.415 139.316,20.415 139.33,20.434 139.34,20.454 139.35,20.496 139.351,20.541
no net on In2.Cu "In2.Cu--15" (solid, remove dead copper, pour order 623): 183.045,77.686 182.741,77.686 182.741,77.734 182.74,77.779 182.73,77.821 182.72,77.841 182.705,77.861 183.08,77.861 183.066,77.841 183.056,77.821 183.046,77.779 183.045,77.734
no net on In2.Cu "In2.Cu--14" (solid, remove dead copper, pour order 622): 140.05,20.717 140.354,20.717 140.354,20.668 140.356,20.623 140.366,20.581 140.376,20.561 140.39,20.542 140.015,20.542 140.029,20.561 140.039,20.581 140.049,20.623 140.05,20.668
no net on In2.Cu "In2.Cu--13" (solid, remove dead copper, pour order 621): 114.796,27.776 115.1,27.776 115.1,27.727 115.101,27.682 115.111,27.64 115.121,27.62 115.135,27.601 114.76,27.601 114.775,27.62 114.785,27.64 114.795,27.682 114.796,27.727
no net on In2.Cu "In2.Cu--12" (solid, remove dead copper, pour order 620): 95.349,56.29 95.349,55.985 95.301,55.986 95.255,55.984 95.214,55.974 95.194,55.964 95.175,55.95 95.175,56.325 95.194,56.31 95.214,56.3 95.255,56.29 95.301,56.289
no net on In2.Cu "In2.Cu--11" (solid, remove dead copper, pour order 619): 57.503,53.623 57.503,53.318 57.455,53.319 57.409,53.317 57.368,53.307 57.348,53.297 57.329,53.283 57.329,53.658 57.348,53.643 57.368,53.633 57.409,53.623 57.455,53.622
no net on In2.Cu "In2.Cu--10" (solid, remove dead copper, pour order 618): 160.53,16.83 160.223,16.883 160.265,16.923 160.299,16.961 160.31,16.981 160.316,17.002 160.314,17.025 160.305,17.049 160.653,16.954 160.611,16.925 160.587,16.898 160.564,16.869
no net on In2.Cu "In2.Cu--9" (solid, remove dead copper, pour order 617): 90.028,19.028 90.028,19.333 90.077,19.332 90.122,19.333 90.164,19.343 90.184,19.353 90.204,19.368 90.204,18.993 90.184,19.007 90.164,19.017 90.122,19.027 90.077,19.029
no net on In2.Cu "In2.Cu--8" (solid, remove dead copper, pour order 616): 154.604,21.198 154.82,21.413 154.854,21.378 154.887,21.348 154.924,21.325 154.945,21.318 154.968,21.314 154.704,21.049 154.7,21.073 154.693,21.094 154.671,21.131 154.64,21.164
no net on In2.Cu "In2.Cu--7" (solid, remove dead copper, pour order 615): 103.178,41.38 103.178,41.685 103.226,41.684 103.272,41.685 103.313,41.695 103.333,41.705 103.353,41.72 103.353,41.345 103.333,41.359 103.313,41.369 103.272,41.379 103.226,41.381
no net on In2.Cu "In2.Cu--6" (solid, remove dead copper, pour order 614): 150.152,80.487 149.848,80.487 149.848,80.536 149.847,80.581 149.837,80.623 149.827,80.643 149.812,80.662 150.187,80.662 150.173,80.643 150.163,80.623 150.153,80.581 150.152,80.536
no net on In2.Cu "In2.Cu--5" (solid, remove dead copper, pour order 613): 132.965,80.314 133.27,80.308 133.264,80.233 133.258,80.168 133.258,80.138 133.265,80.108 133.278,80.079 133.3,80.048 132.925,80.055 132.948,80.085 132.962,80.114 132.97,80.144 132.972,80.174 132.968,80.239
no net on In2.Cu "In2.Cu--4" (solid, remove dead copper, pour order 612): 144.183,17.371 143.879,17.371 143.879,17.42 143.878,17.465 143.868,17.507 143.858,17.527 143.843,17.546 144.218,17.546 144.204,17.527 144.194,17.507 144.184,17.465 144.183,17.42
no net on In2.Cu "In2.Cu--3" (solid, remove dead copper, pour order 611): 127.369,63.209 127.673,63.209 127.673,63.16 127.674,63.115 127.684,63.073 127.694,63.053 127.708,63.034 127.333,63.034 127.348,63.053 127.358,63.073 127.368,63.115 127.369,63.16
no net on In2.Cu "In2.Cu--2" (solid, remove dead copper, pour order 610): 120.561,45.256 120.257,45.256 120.257,45.305 120.256,45.35 120.246,45.392 120.236,45.412 120.221,45.431 120.596,45.431 120.582,45.412 120.572,45.392 120.562,45.35 120.561,45.305
no net on In2.Cu "In2.Cu--1" (solid, remove dead copper, pour order 609): 48.933,67.1 48.629,67.1 48.629,67.149 48.628,67.194 48.618,67.236 48.608,67.256 48.593,67.275 48.968,67.275 48.954,67.256 48.944,67.236 48.934,67.194 48.933,67.149
no net on In2.Cu "In2.Cu-" (solid, remove dead copper, pour order 608): 90.793,19.335 90.795,19.03 90.719,19.034 90.654,19.039 90.624,19.037 90.595,19.03 90.565,19.016 90.535,18.993 90.533,19.368 90.564,19.346 90.593,19.332 90.623,19.326 90.653,19.324 90.718,19.329
no net on Edge.Cuts "Edge.Cuts--3" (solid, remove dead copper, pour order 605): 78.692,44.513 81.224,44.513 81.224,41.98 78.692,41.98
no net on Edge.Cuts "Edge.Cuts--2" (solid, remove dead copper, pour order 604): 71,40.966 73.533,40.966 73.533,38.433 71,38.433
no net on Edge.Cuts "Edge.Cuts--1" (solid, remove dead copper, pour order 603): 74.314,35.145 76.847,35.145 76.847,32.612 74.314,32.612
no net on Edge.Cuts "Edge.Cuts-" (solid, remove dead copper, pour order 602): 80.962,38.211 83.495,38.211 83.495,35.679 80.962,35.679

## Keep-outs
F.Cu:
  region: 158.337,14.017 157.946,14.017 157.946,14.969 158.337,14.969
  region: 155.207,28.189 155.207,25.776 154.719,25.288 151.238,25.288 150.55,25.976 150.55,28.104 151.27,28.824 154.572,28.824
  region: 147.094,13.783 146.704,13.783 146.704,14.736 147.094,14.736
  region: 160.414,25.785 159.666,25.785 159.666,26.114 160.414,26.114
  region: 150.381,28.163 150.381,25.879 150.032,25.531 144.539,25.531 143.777,26.293 143.777,28.228 144.381,28.833 149.711,28.833
  region: 141.489,23.25 141.099,23.25 141.099,24.202 141.489,24.202
  region: 153.686,21.675 153.686,16.119 146.308,16.119 146.306,16.117 146.306,16.118 146.306,23.506 151.854,23.506

## Other copper
F.SilkS:
  region: 76 vertices and 13 holes, not listed, extent 241.739,23.943 257.981,44.865
  region: 157 vertices and 0 holes, not listed, extent 129.558,17.789 136.097,24.512
  region: 244.805,28.173 244.85,28.146 244.941,28.086 245.237,27.879 245.369,27.783 245.395,27.761 245.429,27.721 245.471,27.659 245.503,27.595 245.525,27.529 245.532,27.496 245.538,27.461 245.54,27.426 245.541,27.39 245.539,27.353 245.534,27.316 245.527,27.277 245.516,27.238 245.503,27.197 245.487,27.156 245.468,27.113 245.445,27.07 245.425,27.033 245.54,26.955 245.607,26.908 245.641,26.879 245.656,26.858 245.659,26.848 245.66,26.838 245.655,26.821 245.645,26.802 245.607,26.754 245.582,26.727 245.571,26.721 245.558,26.721 245.542,26.726 245.52,26.738 245.451,26.784 245.436,26.794 245.318,26.874 245.288,26.836 245.262,26.805 245.198,26.738 245.134,26.684 245.071,26.642 245.008,26.611 244.945,26.591 244.912,26.584 244.879,26.58 244.846,26.578 244.812,26.579 244.776,26.582 244.74,26.588 244.709,26.595 244.681,26.603 244.652,26.613 244.62,26.629 244.582,26.65 244.474,26.719 244.304,26.832 244.279,26.849 244.125,26.953 244.047,27.009 244.029,27.025 244.021,27.036 244.019,27.045 244.022,27.053 244.023,27.056 244.027,27.065 244.045,27.095 244.071,27.13 244.102,27.166 244.112,27.174 244.117,27.174 244.126,27.171 244.163,27.15 244.372,27.011 244.446,26.961 244.586,26.873 244.684,26.819 244.759,26.786 244.82,26.769 244.872,26.762 244.919,26.765 244.943,26.77 244.966,26.778 244.99,26.79 245.015,26.804 245.044,26.825 245.074,26.85 245.118,26.893 245.166,26.944 245.183,26.964 244.773,27.241 244.495,27.43 244.368,27.519 244.359,27.526 244.358,27.535 244.359,27.548 244.366,27.567 244.378,27.589 244.409,27.634 244.436,27.662 244.455,27.674 244.467,27.675 244.468,27.674 244.601,27.587 244.886,27.397 245.291,27.124 245.309,27.158 245.321,27.18 245.355,27.254 245.375,27.313 245.383,27.365 245.381,27.412 245.377,27.436 245.37,27.459 245.36,27.483 245.347,27.508 245.33,27.535 245.308,27.562 245.28,27.593 245.247,27.626 245.201,27.667 245.148,27.709 245.065,27.772 244.967,27.84 244.892,27.891 244.77,27.975 244.733,28.002 244.711,28.023 244.699,28.039 244.697,28.053 244.702,28.067 244.712,28.083 244.723,28.1 244.747,28.136 244.772,28.163 244.79,28.174 244.797,28.175
  region: 253.206,40.056 253.242,40.051 253.279,40.045 253.317,40.035 253.358,40.022 253.399,40.006 253.442,39.987 253.485,39.964 253.531,39.938 253.577,39.908 253.618,39.879 253.699,39.815 253.763,39.752 253.813,39.692 253.85,39.632 253.876,39.574 253.892,39.516 253.898,39.457 253.897,39.428 253.894,39.398 253.888,39.367 253.88,39.337 253.868,39.305 253.854,39.273 253.836,39.239 253.816,39.206 253.771,39.146 253.724,39.097 253.676,39.06 253.626,39.033 253.599,39.022 253.572,39.015 253.544,39.009 253.515,39.006 253.485,39.005 253.453,39.007 253.419,39.012 253.383,39.019 253.345,39.03 253.305,39.044 253.261,39.062 253.216,39.084 253.166,39.112 253.114,39.143 253.021,39.207 252.946,39.269 252.886,39.331 252.84,39.392 252.805,39.452 252.781,39.511 252.767,39.571 252.763,39.63 252.765,39.66 252.769,39.69 252.775,39.721 252.785,39.751 252.79,39.766 252.821,39.836 252.857,39.896 252.898,39.945 252.944,39.985 252.968,40.002 252.994,40.017 253.02,40.029 253.048,40.039 253.077,40.047 253.107,40.053 253.139,40.056 253.172,40.057
  region: 247.456,30.923 247.487,30.918 247.519,30.91 247.553,30.899 247.588,30.885 247.624,30.868 247.661,30.847 247.699,30.822 247.76,30.776 247.812,30.726 247.852,30.675 247.881,30.623 247.899,30.572 247.907,30.521 247.906,30.47 247.901,30.444 247.894,30.419 247.885,30.394 247.873,30.369 247.858,30.345 247.84,30.32 247.819,30.296 247.796,30.272 247.784,30.262 247.764,30.247 247.743,30.235 247.72,30.225 247.696,30.216 247.67,30.21 247.643,30.207 247.614,30.205 247.584,30.207 247.552,30.211 247.52,30.218 247.486,30.228 247.452,30.24 247.418,30.256 247.384,30.274 247.351,30.294 247.32,30.316 247.263,30.366 247.215,30.419 247.178,30.473 247.152,30.527 247.136,30.58 247.131,30.63 247.134,30.679 247.147,30.726 247.169,30.773 247.2,30.822 247.236,30.86 247.276,30.89 247.298,30.901 247.321,30.911 247.346,30.918 247.371,30.923 247.398,30.926 247.426,30.926
  region: 251.75,37.333 251.78,37.329 251.812,37.322 251.845,37.311 251.88,37.298 251.916,37.281 251.953,37.261 251.968,37.252 252.046,37.199 252.11,37.145 252.16,37.092 252.197,37.04 252.221,36.99 252.234,36.942 252.237,36.898 252.231,36.856 252.224,36.835 252.215,36.816 252.203,36.797 252.189,36.779 252.172,36.761 252.152,36.745 252.129,36.729 252.104,36.714 252.074,36.7 252.042,36.688 252.006,36.677 251.967,36.668 251.875,36.649 251.703,36.765 251.531,36.881 251.514,36.953 251.508,36.981 251.498,37.056 251.497,37.117 251.506,37.167 251.519,37.208 251.542,37.249 251.556,37.267 251.571,37.283 251.588,37.296 251.606,37.308 251.626,37.318 251.647,37.325 251.671,37.331 251.695,37.334 251.722,37.335
  region: 250.995,35.725 251.169,35.607 251.188,35.515 251.193,35.482 251.2,35.409 251.196,35.346 251.185,35.294 251.166,35.251 251.142,35.216 251.127,35.201 251.111,35.189 251.093,35.178 251.073,35.169 251.052,35.162 251.029,35.158 251.004,35.155 250.977,35.156 250.948,35.158 250.917,35.164 250.884,35.173 250.85,35.184 250.813,35.2 250.775,35.218 250.735,35.241 250.694,35.267 250.639,35.306 250.575,35.36 250.528,35.41 250.496,35.457 250.475,35.503 250.464,35.549 250.463,35.572 250.464,35.596 250.467,35.62 250.473,35.645 250.488,35.682 250.499,35.701 250.512,35.719 250.528,35.736 250.546,35.751 250.568,35.767 250.592,35.781 250.621,35.794 250.653,35.806 250.693,35.817 250.736,35.827 250.82,35.843
  region: 250.088,34.882 250.114,34.879 250.141,34.873 250.167,34.864 250.194,34.853 250.22,34.84 250.262,34.816 250.107,34.586 249.953,34.357 249.939,34.366 249.917,34.383 249.897,34.402 249.878,34.422 249.862,34.445 249.847,34.469 249.824,34.521 249.81,34.574 249.806,34.627 249.811,34.676 249.826,34.725 249.837,34.749 249.849,34.77 249.864,34.79 249.88,34.809 249.899,34.825 249.918,34.84 249.94,34.853 249.962,34.863 249.986,34.872 250.01,34.878 250.035,34.882 250.061,34.883
  region: 136.407,20.706 136.528,20.586 136.915,20.195 137.09,20.014 137.125,19.975 137.127,19.972 137.12,19.967 137.097,19.958 136.982,19.919 136.315,19.697 136.234,19.67 136.13,19.636 136.089,19.626 136.072,19.625 136.063,19.63 136.061,19.637 136.062,19.647 136.068,19.671 136.077,19.703 136.114,19.844 136.149,19.983 136.212,20.226 136.257,20.401 136.275,20.472 136.293,20.544 136.315,20.63 136.325,20.665 136.335,20.705 136.342,20.732 136.348,20.748 136.352,20.751 136.357,20.753
  region: 246.486,30.165 246.509,30.16 246.535,30.152 246.561,30.141 246.59,30.126 246.621,30.106 246.673,30.067 246.712,30.026 246.739,29.986 246.756,29.944 246.76,29.922 246.763,29.899 246.763,29.874 246.761,29.848 246.755,29.819 246.747,29.79 246.734,29.756 246.718,29.72 246.695,29.679 246.669,29.635 246.597,29.525 246.352,29.69 246.106,29.856 246.183,29.963 246.235,30.031 246.288,30.086 246.334,30.124 246.378,30.149 246.42,30.163 246.442,30.166 246.463,30.167
  region: 249.045,33.264 249.095,33.247 249.143,33.221 249.173,33.201 249.018,32.972 248.864,32.743 248.844,32.76 248.824,32.779 248.781,32.83 248.749,32.88 248.729,32.93 248.718,32.979 248.716,33.004 248.717,33.029 248.721,33.054 248.726,33.079 248.745,33.127 248.757,33.149 248.772,33.17 248.788,33.189 248.806,33.207 248.826,33.223 248.847,33.236 248.869,33.248 248.893,33.257 248.942,33.269 248.994,33.271
  text "CLK" at 167.832,23.67 h0.91 r135
  text "DIO" at 167.044,22.624 h0.91 r135
  text "GND" at 165.824,22.011 h0.91 r135
  text "+3.3V" at 164.414,21.587 h0.91 r135
  text "ONE-HANDED_KEYBOARD_MR" at 141.038,13.077 h1.12
B.SilkS:
  region: 157 vertices and 0 holes, not listed, extent 158.128,27.182 170.193,31.47
  region: 169.097,28.679 169.115,28.66 169.148,28.607 169.222,28.461 169.279,28.346 169.749,27.409 169.828,27.245 169.843,27.211 169.846,27.199 169.84,27.198 169.762,27.194 169.386,27.188 168.566,27.183 168.311,27.184 168.209,27.188 168.205,27.194 168.205,27.202 168.214,27.225 168.235,27.261 168.267,27.314 168.294,27.361 168.362,27.475 168.418,27.57 168.474,27.665 168.611,27.897 168.802,28.22 168.911,28.403 169.022,28.591 169.046,28.635 169.064,28.666 169.074,28.678 169.084,28.683
  text "R" at 167.594,26.803 h0.91 r45
  text "CON1" at 130.78,25.182 h1.12
  text "CON4" at 146.782,19.086 h1.12
  text "CON3" at 151.735,19.086 h1.12
  text "CON2" at 158.974,19.086 h1.12
  text "B" at 165.538,17.955 h0.91 r45